# Altium PCB DSD_PLC_SMALL.PcbDoc (part 2 of 2)
Units mil, origin at the board's own origin, x right, y up, seen from the top; angles counter-clockwise.
Board outline 2820 x 3490 mil, 2 copper layers (Top Layer, Bottom Layer); 165 components, 153 nets, 500 pads, 145 vias.
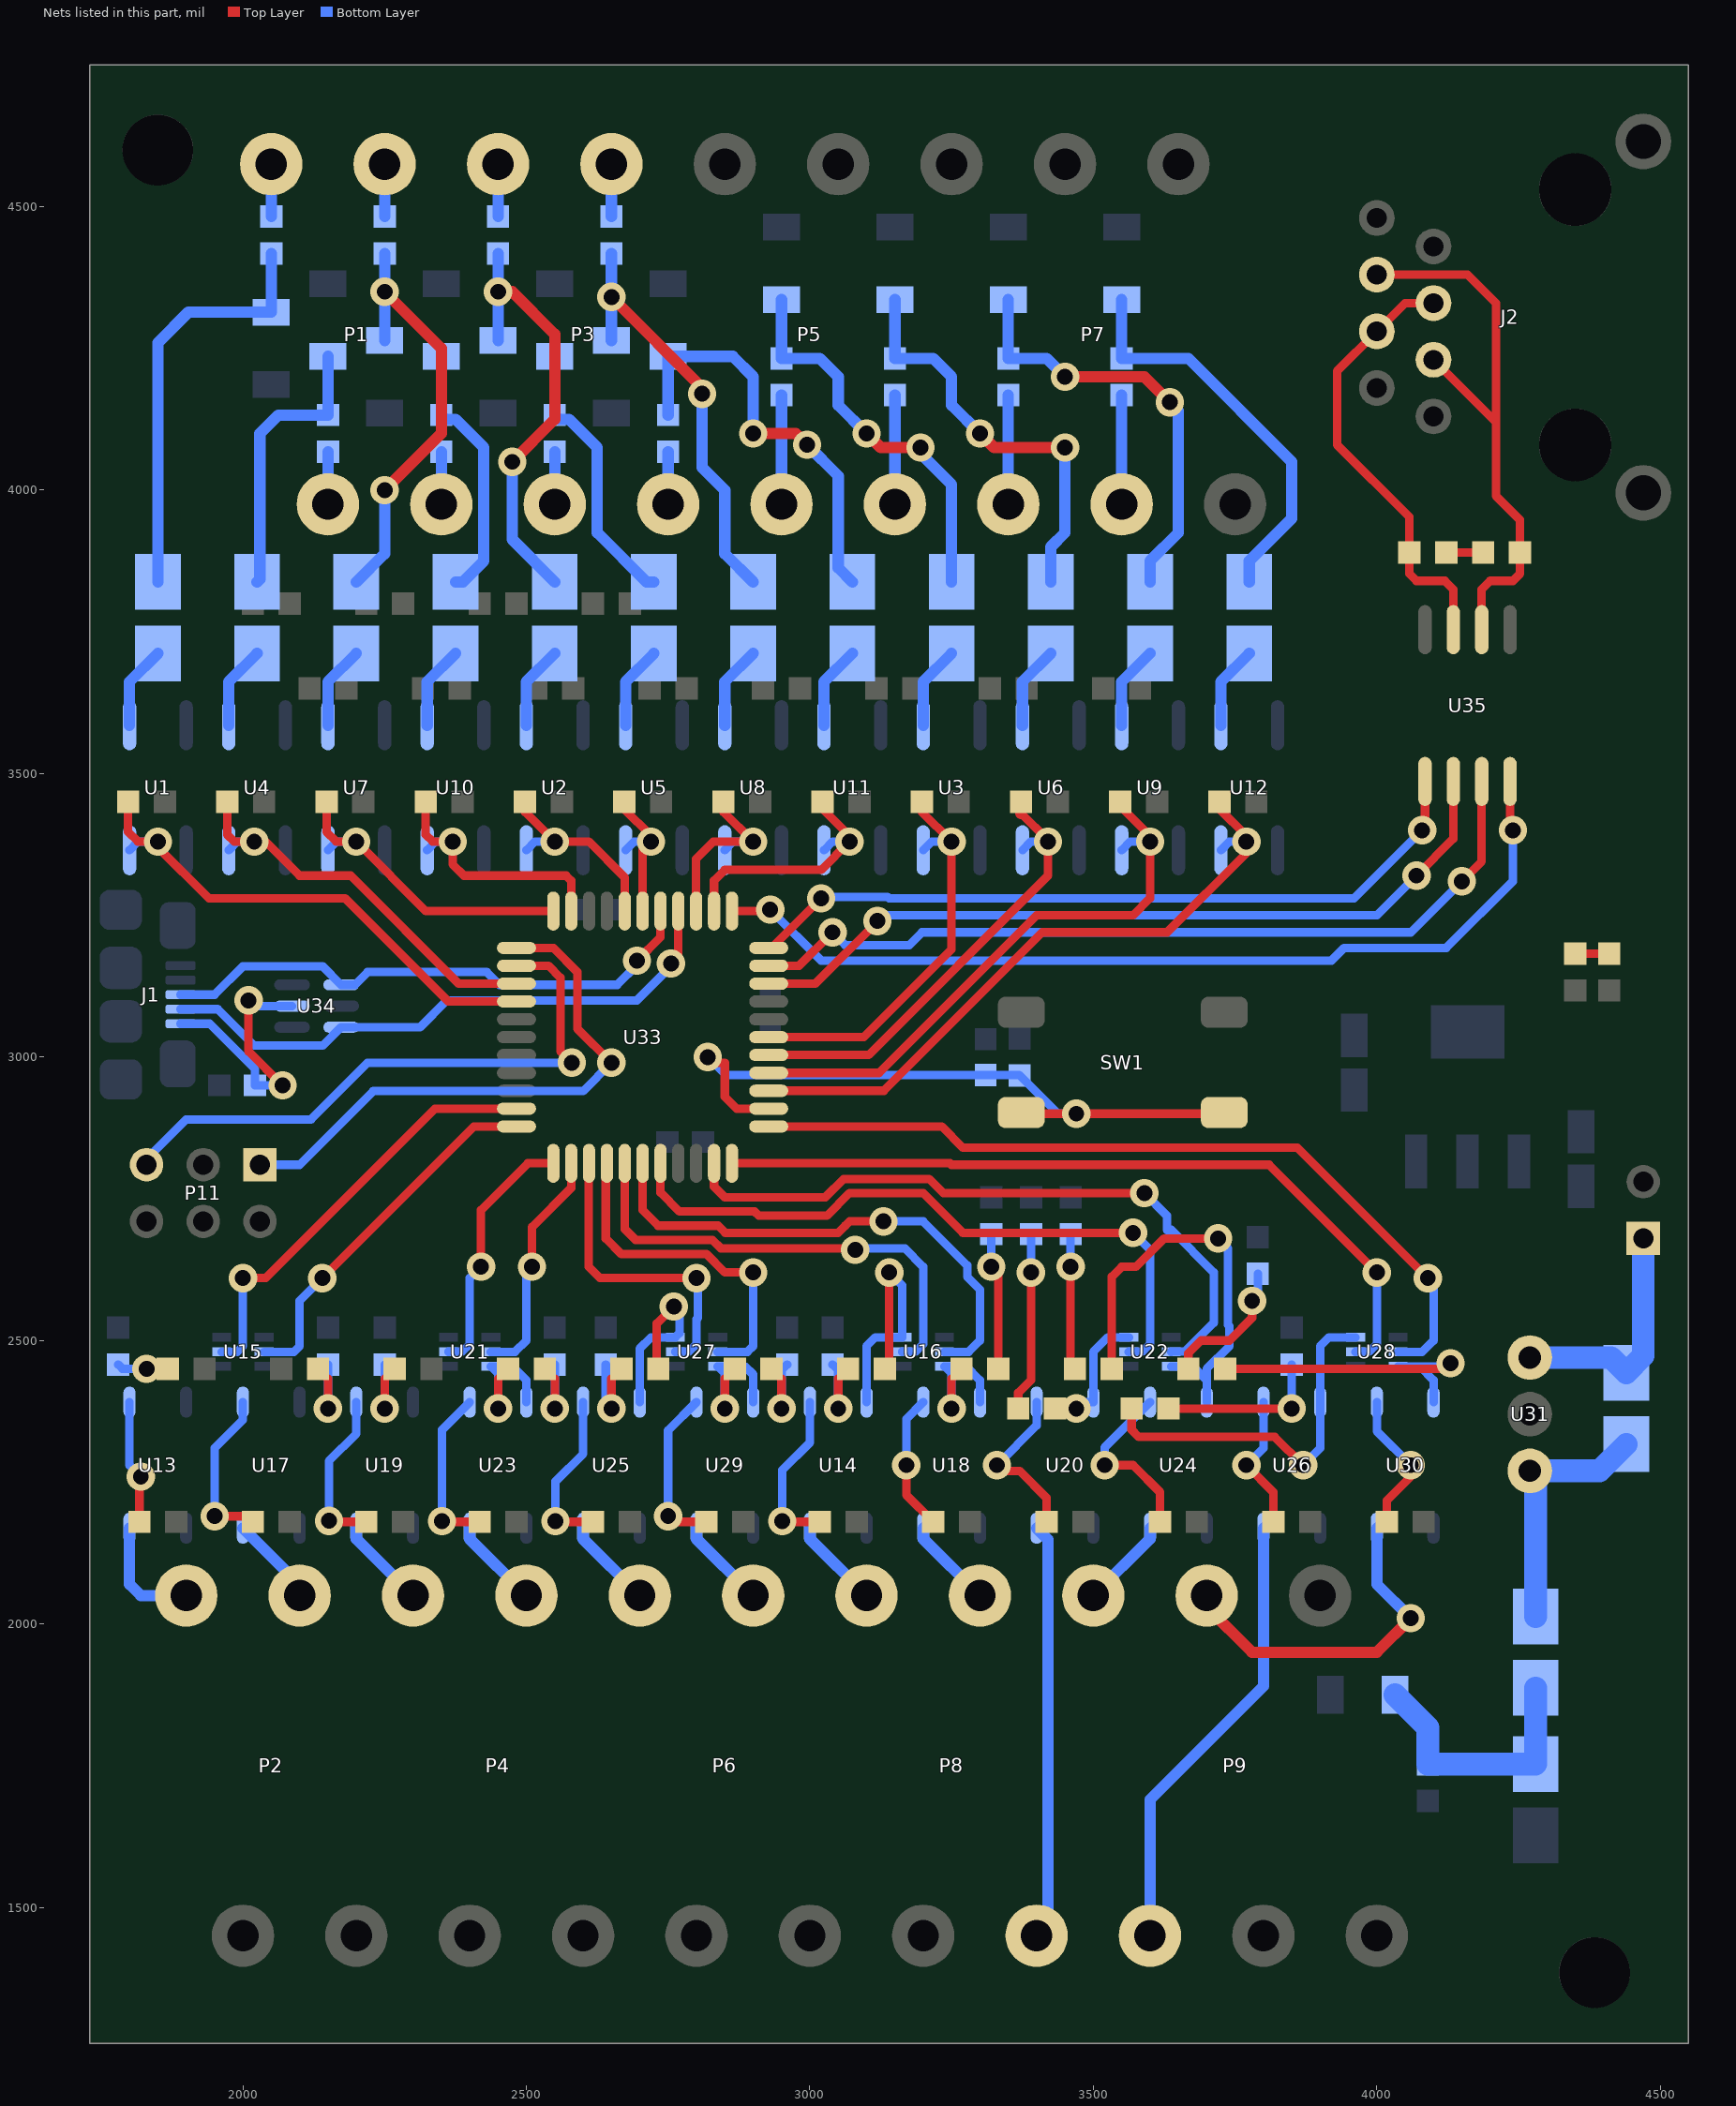
[diagram p2: the nets of this part, all layers, seen from the top]

## Via types
v1: diameter 50, hole 28, Top Layer to Bottom Layer, 145 vias

## Nets (pads, with @x,y where several pads share a name; then routed paths per layer and width w, separated by ;. In a path a pad name is that pad's centre, name@x,y a point inside that pad or via, vN(x,y) a via of type N, cw(c..) or ccw(c..) an arc to the next point about the centre after c; other vN are vias at no path point) (continued)
LED_Y4: D13.2 U21.3 U23.2 | length 268.4
  Top Layer w15: v1(2450,2380) 2450,2432.48 D13.2@2467.52,2450
  Bottom Layer w15: v1(2450,2380) 2450,2441.81 U21.3@2437.4,2454.41 2475.59,2454.41 2500,2430 U23.2@2500,2391.22
LED_Y5: D21.2 U25.2 U27.6 | length 346.8
  Top Layer w15: D21.2@2730,2452.48 2730,2530 v1(2760,2560)
  Bottom Layer w15: U25.2@2700,2391.22 2700,2485.59 2720,2505.59 U27.6@2762.6,2505.59 2770,2512.99 2770,2550 v1(2760,2560)
LED_Y6: D23.2 U27.3 U29.2 | length 274.2
  Top Layer w15: v1(2850,2380) 2850,2432.48 D23.2@2867.52,2450
  Bottom Layer w15: v1(2850,2380) 2850,2441.81 U27.3@2837.4,2454.41 2885.59,2454.41 2900,2440 U29.2@2900,2391.22
LED_Y7: D2.2 U14.2 U16.6 | length 464.7
  Top Layer w15: D2.2@3132.48,2450 3140,2457.52 v1(3140,2620)
  Bottom Layer w15: U14.2@3100,2391.22 3100,2490 3115.59,2505.59 U16.6@3162.6,2505.59 3162.6,2597.4 v1(3140,2620)
LED_Y8: D7.2 U16.3 U18.2 | length 268.4
  Top Layer w15: v1(3250,2380) 3250,2432.48 D7.2@3267.52,2450
  Bottom Layer w15: v1(3250,2380) 3250,2441.81 U16.3@3237.4,2454.41 3275.59,2454.41 3300,2430 U18.2@3300,2391.22
LED_Y9: D12.2 U20.2 U22.6 | length 234.1
  Top Layer w15: D12.2@3432.48,2380 v1(3470,2380)
  Bottom Layer w15: v1(3470,2380) 3481.22,2391.22 U20.2@3500,2391.22 3500,2480 3525.59,2505.59 U22.6@3562.6,2505.59
LED_Y10: D14.2 U22.3 U24.2 | length 764.3
  Top Layer w15: D14.2@3532.48,2450 3532.48,2612.48 3550,2630 3575,2630 3625,2680 v1(3720,2680)
  Bottom Layer w15: U22.3@3637.4,2454.41 3675.59,2454.41 3700,2430 ; U24.2@3700,2391.22 3700,2430 ; v1(3720,2680) 3737.5,2662.5 3737.5,2527.5 3740,2525 3740,2490 3700,2450 3700,2430
LED_Y11: D22.2 U26.2 U28.6 | length 657.4
  Top Layer w15: D22.2@3567.52,2380 3567.52,2342.48 3580,2330 3820,2330 v1(3870,2280)
  Bottom Layer w15: v1(3870,2280) 3900,2310 U26.2@3900,2391.22 3900,2490 3915.59,2505.59 U28.6@3962.6,2505.59
LED_Y12: D24.2 U28.3 U30.2 | length 569.9
  Top Layer w15: D24.2@3732.48,2450 4120,2450 v1(4130,2460)
  Bottom Layer w15: U28.3@4037.4,2454.41 4075.59,2454.41 ; U30.2@4100,2391.22 4100,2430 4075.59,2454.41 ; v1(4130,2460) 4124.41,2454.41 4075.59,2454.41
NetD1_1: D1.1 R1.2 | length 90.6
  Top Layer w15: v1(1830,2450) D1.1@1867.52,2450
  Bottom Layer w15: R1.2@1780,2457.52 1787.52,2450 v1(1830,2450)
NetD2_1: D2.1 R2.2 | length 158.9
  Top Layer w15: v1(3050,2380) 3050,2432.48 D2.1@3067.52,2450
  Bottom Layer w15: R2.2@3040,2457.52 3050,2447.52 v1(3050,2380)
NetD3_1: D3.1 U1.1 | length 147.5
  Bottom Layer w20: U1.1@1800,3585.24 1800,3662.01 D3.1@1850,3712.01
NetD3_2: D3.2 D8.2 R3.1 | length 747.9
  Bottom Layer w20: D3.2@1850,3837.99 1850,4260 1903.98,4313.98 D8.2@2050,4313.98 R3.1@2050,4417.52
NetD4_1: D4.1 U2.1 | length 147.5
  Bottom Layer w20: U2.1@2500,3585.24 2500,3662.01 D4.1@2550,3712.01
NetD4_2: D4.2 D9.2 R4.1 | length 783.7
  Top Layer w20: v1(2450,4350) 2475,4350 2550,4275 2550,4125 v1(2475,4050)
  Bottom Layer w20: D9.2@2450,4263.98 v1(2450,4350) R4.1@2450,4417.52 ; v1(2475,4050) 2475,3912.99 D4.2@2550,3837.99
NetD5_1: D5.1 U3.1 | length 147.5
  Bottom Layer w20: U3.1@3200,3585.24 3200,3662.01 D5.1@3250,3712.01
NetD5_2: D5.2 D10.2 R5.1 | length 702.9
  Top Layer w20: v1(3100,4100) 3125,4075 v1(3195,4075)
  Bottom Layer w20: D10.2@2950,4336.02 R5.1@2950,4232.48 3017.52,4232.48 3050,4200 3050,4150 v1(3100,4100) ; v1(3195,4075) 3195,4065 3250,4010 D5.2@3250,3837.99
NetD6_1: D6.1 R6.2 | length 154.8
  Top Layer w15: D6.1@2132.48,2450 2150,2432.48 v1(2150,2380)
  Bottom Layer w15: v1(2150,2380) R6.2@2150,2457.52
NetD7_1: D7.1 R7.2 | length 242.7
  Top Layer w15: v1(3320,2630) 3332.48,2617.52 D7.1@3332.48,2450
  Bottom Layer w15: v1(3320,2630) R7.2@3320,2687.52
NetD11_1: D11.1 R11.2 | length 154.8
  Top Layer w15: v1(2250,2380) 2250,2432.48 D11.1@2267.52,2450
  Bottom Layer w15: v1(2250,2380) R11.2@2250,2457.52
NetD12_1: D12.1 R12.2 | length 316.8
  Top Layer w15: D12.1@3367.52,2380 3367.52,2407.52 3390,2430 v1(3390,2620)
  Bottom Layer w15: v1(3390,2620) R12.2@3390,2687.52
NetD13_1: D13.1 R13.2 | length 154.8
  Top Layer w15: D13.1@2532.48,2450 2550,2432.48 v1(2550,2380)
  Bottom Layer w15: v1(2550,2380) R13.2@2550,2457.52
NetD14_1: D14.1 R14.2 | length 240.6
  Top Layer w15: v1(3460,2630) 3460,2457.52 D14.1@3467.52,2450
  Bottom Layer w15: v1(3460,2630) R14.2@3460,2687.52
NetD15_1: D15.1 U4.1 | length 147.5
  Bottom Layer w20: U4.1@1975,3585.24 1975,3662.01 D15.1@2025,3712.01
NetD15_2: D15.2 D18.2 R15.1 | length 501.1
  Bottom Layer w20: D15.2@2025,3837.99 2030,3842.99 2030,4100 2062.48,4132.48 R15.1@2150,4132.48 D18.2@2150,4236.02
NetD16_1: D16.1 U5.1 | length 147.5
  Bottom Layer w20: U5.1@2675,3585.24 2675,3662.01 D16.1@2725,3712.01
NetD16_2: D16.2 D19.2 R16.1 | length 488.4
  Bottom Layer w20: D19.2@2550,4236.02 R16.1@2550,4132.48 2557.48,4125 2575,4125 2625,4075 2625,3925 2712.01,3837.99 D16.2@2725,3837.99
NetD17_1: D17.1 U6.1 | length 147.5
  Bottom Layer w20: U6.1@3375,3585.24 3375,3662.01 D17.1@3425,3712.01
NetD17_2: D17.2 D20.2 R17.1 | length 745.4
  Top Layer w20: v1(3300,4100) 3325,4075 v1(3450,4075)
  Bottom Layer w20: D20.2@3150,4336.02 R17.1@3150,4232.48 3217.52,4232.48 3250,4200 3250,4150 v1(3300,4100) ; D17.2@3425,3837.99 3425,3900 3450,3925 v1(3450,4075)
NetD21_1: D21.1 R21.2 | length 158.9
  Top Layer w15: v1(2650,2380) 2650,2432.48 D21.1@2667.52,2450
  Bottom Layer w15: R21.2@2640,2457.52 2640,2390 v1(2650,2380)
NetD22_1: D22.1 R22.2 | length 295
  Top Layer w15: D22.1@3632.48,2380 v1(3850,2380)
  Bottom Layer w15: v1(3850,2380) R22.2@3850,2457.52
NetD23_1: D23.1 R23.2 | length 158.9
  Top Layer w15: D23.1@2932.48,2450 2950,2432.48 v1(2950,2380)
  Bottom Layer w15: v1(2950,2380) 2950,2447.52 R23.2@2960,2457.52
NetD24_1: D24.1 R24.2 | length 247.5
  Top Layer w15: D24.1@3667.52,2450 3667.52,2477.52 3690,2500 3740,2500 3780,2540 v1(3780,2570)
  Bottom Layer w15: v1(3780,2570) 3790,2580 R24.2@3790,2617.52
NetD25_1: D25.1 U7.1 | length 147.5
  Bottom Layer w20: U7.1@2150,3585.24 2150,3662.01 D25.1@2200,3712.01
NetD25_2: D25.2 D28.2 R25.1 | length 769.1
  Top Layer w20: v1(2250,4000) 2350,4100 2350,4250 v1(2250,4350)
  Bottom Layer w20: D25.2@2200,3837.99 2250,3887.99 v1(2250,4000) ; D28.2@2250,4263.98 v1(2250,4350) R25.1@2250,4417.52
NetD26_1: D26.1 U8.1 | length 147.5
  Bottom Layer w20: U8.1@2850,3585.24 2850,3662.01 D26.1@2900,3712.01
NetD26_2: D26.2 D29.2 R26.1 | length 759.9
  Top Layer w20: v1(2650,4340.75) 2810,4180.75 v1(2810,4170)
  Bottom Layer w20: D29.2@2650,4263.98 v1(2650,4340.75) R26.1@2650,4417.52 ; v1(2810,4170) 2810,4040 2850,4000 2850,3887.99 D26.2@2900,3837.99
NetD27_1: D27.1 U9.1 | length 147.5
  Bottom Layer w20: U9.1@3550,3585.24 3550,3662.01 D27.1@3600,3712.01
NetD27_2: D27.2 D30.2 R27.1 | length 764.6
  Top Layer w20: v1(3450,4200) 3590,4200 v1(3635,4155)
  Bottom Layer w20: D30.2@3350,4336.02 R27.1@3350,4232.48 3417.52,4232.48 v1(3450,4200) ; D27.2@3600,3837.99 3600,3875 3650,3925 3650,4140 v1(3635,4155)
NetD35_1: D35.1 U10.1 | length 147.5
  Bottom Layer w20: U10.1@2325,3585.24 2325,3662.01 D35.1@2375,3712.01
NetD35_2: D35.2 D40.2 R31.1 | length 467.7
  Bottom Layer w20: D40.2@2350,4236.02 R31.1@2350,4132.48 2357.48,4125 2375,4125 2425,4075 2425,3875 2387.99,3837.99 D35.2@2375,3837.99
NetD36_1: D36.1 U11.1 | length 147.5
  Bottom Layer w20: U11.1@3025,3585.24 3025,3662.01 D36.1@3075,3712.01
NetD36_2: D36.2 D41.2 R32.1 | length 746.9
  Top Layer w20: v1(2900,4100) 2975,4100 v1(2995,4080)
  Bottom Layer w20: R32.1@2750,4132.48 D41.2@2750,4236.02 2863.98,4236.02 2900,4200 v1(2900,4100) ; v1(2995,4080) 3050,4025 3050,3862.99 D36.2@3075,3837.99
NetD37_1: D37.1 U12.1 | length 147.5
  Bottom Layer w20: U12.1@3725,3585.24 3725,3662.01 D37.1@3775,3712.01
NetD37_2: D37.2 D42.2 R33.1 | length 722.2
  Bottom Layer w20: D42.2@3550,4336.02 R33.1@3550,4232.48 3667.52,4232.48 3850,4050 3850,3950 3775,3875 D37.2@3775,3837.99
NetD49_1: D49.1 R49.2 | length 60
  Top Layer w15: R49.2@4350,3182.48 D49.1@4410,3182.48
NetD50_1: D50.1 P10.1 U31.3 | length 430.6
  Bottom Layer w40: U31.3@4270,2470 4412.99,2470 D50.1@4440,2442.99 4470,2472.99 P10.1@4470,2680
NetD50_2: D50.2 D51.2 U31.1 | length 450.6
  Bottom Layer w40: D51.2@4280,2012.99 4280,2260 U31.1@4270,2270 4392.99,2270 D50.2@4440,2317.01
NetD51_1: D51.1 D52.2 F1.2 M1.1 | length 470.7
  Bottom Layer w20: D52.2@4279.49,1752.48 D52.2@4280,1752.99
  Bottom Layer w40: F1.2@4032.09,1875 4090,1817.09 M1.1@4090,1752.48 D52.2@4279.49,1752.48 ; D52.2@4280,1752.99 D51.1@4280,1887.01
NetJ2_3: J2.3 J2.6 R52.1 U35.6 | length 1031.4
  Top Layer w15: J2.6@4000,4380 4160,4380 4210,4330 4210,4120 ; J2.3@4100,4230 4210,4120 ; U35.6@4185,3753.86 4185,3825 4200,3840 4240,3840 4252.48,3852.48 R52.1@4252.48,3890 4252.48,3947.52 4210,3990 4210,4120
NetJ2_4: J2.4 J2.5 R51.2 U35.7 | length 790.1
  Top Layer w15: J2.5@4100,4330 4050,4330 J2.4@4000,4280 3930,4210 3930,4080 4057.52,3952.48 R51.2@4057.52,3890 4057.52,3852.48 4070,3840 4120,3840 4135,3825 U35.7@4135,3753.86
NetR37_1: R37.1 U13.1 | length 220.5
  Top Layer w15: R37.1@1817.52,2180 1817.52,2257.52 v1(1820,2260)
  Bottom Layer w15: U13.1@1800,2391.22 1800,2280 v1(1820,2260)
NetR38_1: R38.1 U14.1 | length 297
  Top Layer w15: v1(2951.21,2181.21) 2952.42,2180 R38.1@3017.52,2180
  Bottom Layer w15: v1(2951.21,2181.21) 2951.21,2271.21 3000,2320 U14.1@3000,2391.22
NetR39_1: R39.1 U17.1 | length 293.6
  Top Layer w15: v1(1950,2190) 2007.52,2190 R39.1@2017.52,2180
  Bottom Layer w15: v1(1950,2190) 1950,2310 2000,2360 U17.1@2000,2391.22
NetR40_1: R40.1 U18.1 | length 243.3
  Top Layer w15: v1(3170,2280) 3170,2227.52 R40.1@3217.52,2180
  Bottom Layer w15: v1(3170,2280) 3170,2361.22 U18.1@3200,2391.22
NetR41_1: R41.1 U19.1 | length 295.8
  Top Layer w15: v1(2151.82,2181.82) 2153.64,2180 R41.1@2217.52,2180
  Bottom Layer w15: v1(2151.82,2181.82) 2151.82,2287.43 2200,2335.61 U19.1@2200,2391.22
NetR42_1: R42.1 U20.1 | length 294
  Top Layer w15: v1(3330,2280) 3340,2270 3370,2270 3417.52,2222.48 R42.1@3417.52,2180
  Bottom Layer w15: v1(3330,2280) 3400,2350 U20.1@3400,2391.22
NetR43_1: R43.1 U23.1 | length 297
  Top Layer w15: v1(2351.21,2181.21) 2352.42,2180 R43.1@2417.52,2180
  Bottom Layer w15: v1(2351.21,2181.21) 2351.21,2342.43 U23.1@2400,2391.22
NetR44_1: R44.1 U24.1 | length 314
  Top Layer w15: v1(3520,2280) 3570,2280 3617.52,2232.48 R44.1@3617.52,2180
  Bottom Layer w15: v1(3520,2280) 3520,2311.22 U24.1@3600,2391.22
NetR45_1: R45.1 U25.1 | length 297
  Top Layer w15: v1(2551.21,2181.21) 2552.42,2180 R45.1@2617.52,2180
  Bottom Layer w15: v1(2551.21,2181.21) 2551.21,2251.21 2600,2300 U25.1@2600,2391.22
NetR46_1: R46.1 U26.1 | length 243.3
  Top Layer w15: v1(3770,2280) 3817.52,2232.48 R46.1@3817.52,2180
  Bottom Layer w15: v1(3770,2280) 3800,2310 U26.1@3800,2391.22
NetR47_1: R47.1 U29.1 | length 279.5
  Top Layer w15: v1@2760,2180 R47.1@2817.52,2180
  Bottom Layer w15: v1(2750,2190) 2750,2341.22 U29.1@2800,2391.22
NetR48_1: R48.1 U30.1 | length 253.7
  Top Layer w15: R48.1@4017.52,2180 4017.52,2217.52 4060,2260 v1(4060,2280)
  Bottom Layer w15: U30.1@4000,2391.22 4000,2340 v1(4060,2280)
NetR51_1: R51.1 R52.2 | length 65
  Top Layer w15: R51.1@4122.48,3890 R52.2@4187.52,3890
PDI_CLK: P11.5 U33.35 | length 1074.8
  Top Layer w15: U33.35@2482.56,3160.98 2539.02,3160.98 2560,3140 2560,3010 v1(2580,2990)
  Bottom Layer w15: P11.5@1830,2810 1830,2820 1900,2890 2120,2890 2220,2990 v1(2580,2990)
PDI_DATA: P11.1 U33.34 | length 1004.4
  Top Layer w15: U33.34@2482.56,3192.48 2547.52,3192.48 2590,3150 2590,3050 v1(2650,2990)
  Bottom Layer w15: P11.1@2030,2810 2100,2810 2230,2940 2600,2940 v1(2650,2990)
RS485_DE: U33.21 U35.3 | length 1493.6
  Top Layer w15: U33.21@2927.44,3160.98 2980.98,3160.98 v1(3040,3220) ; v1(4150,3310) 4185,3345 U35.3@4185,3486.14
  Bottom Layer w15: v1(3040,3220) 3062.5,3197.5 3175.36,3197.5 3197.86,3220 4060,3220 v1(4150,3310)
RS485_RE: U33.20 U35.2 | length 1424.9
  Top Layer w15: U33.20@2927.44,3129.49 3009.59,3129.49 3119.29,3239.19 v1(3119.29,3240) ; v1@4070,3329.9 v1(4070,3320) 4135,3385 U35.2@4135,3486.14
  Bottom Layer w15: v1(3119.29,3240) 3129.29,3250 4000,3250 v1(4070,3320)
RS485_RX: U33.22 U35.1 | length 1328.8
  Top Layer w15: U33.22@2927.44,3192.48 2932.48,3192.48 v1(3020,3280) ; v1(4080,3400) 4085,3405 U35.1@4085,3486.14
  Bottom Layer w15: v1(3020,3280) 3022.5,3282.5 3136.89,3282.5 3139.39,3280 3960,3280 v1(4080,3400)
RS485_TX: U33.23 U35.4 | length 1652.1
  Top Layer w15: U33.23@2862.48,3257.44 2927.44,3257.44 v1(2930,3260) ; U35.4@4235,3486.14 4235,3405 v1(4240,3400)
  Bottom Layer w15: v1(2930,3260) 3020,3170 3919.9,3170 3942.4,3192.5 4122.5,3192.5 4240,3310 v1(4240,3400)
S_X1: R8.1 U1.6 U33.37 | length 924
  Top Layer w15: R8.1@1797.52,3450 1797.52,3397.18 1814.7,3380 v1(1850,3380) 1850,3370 1940,3280 2180,3280 2362.01,3097.99 U33.37@2482.56,3097.99
  Bottom Layer w15: U1.6@1800,3364.76 1815.24,3380 v1(1850,3380)
S_X2: R18.1 U4.6 U33.36 | length 728
  Top Layer w15: R18.1@1972.52,3450 1972.52,3392.18 1984.7,3380 v1(2020,3380) 2040,3380 2100,3320 2190,3320 2380.51,3129.49 U33.36@2482.56,3129.49
  Bottom Layer w15: U4.6@1975,3364.76 1990.24,3380 v1(2020,3380)
S_X3: R28.1 U7.6 U33.33 | length 567
  Top Layer w15: R28.1@2147.52,3450 2147.52,3397.18 2164.7,3380 v1(2200,3380) 2322.56,3257.44 U33.33@2547.52,3257.44
  Bottom Layer w15: U7.6@2150,3364.76 2165.24,3380 v1(2200,3380)
S_X4: R34.1 U10.6 U33.32 | length 476.2
  Top Layer w15: R34.1@2322.52,3450 2322.52,3392.18 2334.7,3380 v1(2370,3380) 2370,3340 2390,3320 2570,3320 2579.02,3310.98 U33.32@2579.02,3257.44
  Bottom Layer w15: U10.6@2325,3364.76 2340.24,3380 v1(2370,3380)
S_X5: R9.1 U2.6 U33.29 | length 356.9
  Top Layer w15: R9.1@2497.52,3450 2497.52,3432.48 v1(2550,3380) 2610,3380 2673.5,3316.5 U33.29@2673.5,3257.44
  Bottom Layer w15: U2.6@2500,3364.76 2515.24,3380 v1(2550,3380)
S_X6: R19.1 U5.6 U33.28 | length 269.8
  Top Layer w15: R19.1@2672.52,3450 2672.52,3437.48 2720,3390 v1(2720,3380) 2705,3365 U33.28@2705,3257.44
  Bottom Layer w15: U5.6@2675,3364.76 2690.24,3380 v1(2720,3380)
S_X7: R29.1 U8.6 U33.25 | length 353.2
  Top Layer w15: U33.25@2799.49,3257.44 2799.49,3349.49 2830,3380 v1(2900,3380) 2847.52,3432.48 R29.1@2847.52,3450
  Bottom Layer w15: U8.6@2850,3364.76 2865.24,3380 v1(2900,3380)
S_X8: R35.1 U11.6 U33.24 | length 462.1
  Top Layer w15: U33.24@2830.98,3257.44 2830.98,3310.98 2850,3330 3020,3330 v1(3070,3380) 3070,3390 3022.52,3437.48 R35.1@3022.52,3450
  Bottom Layer w15: U11.6@3025,3364.76 3040.24,3380 v1(3070,3380)
S_X9: R10.1 U3.6 U33.17 | length 724.8
  Top Layer w15: U33.17@2927.44,3035 3095,3035 3250,3190 v1(3250,3380) 3197.52,3432.48 R10.1@3197.52,3450
  Bottom Layer w15: U3.6@3200,3364.76 3215.24,3380 v1(3250,3380)
S_X10: R20.1 U6.6 U33.16 | length 824.6
  Top Layer w15: U33.16@2927.44,3003.5 3103.5,3003.5 3420,3320 v1(3420,3380) 3420,3382.52 3372.52,3430
  Top Layer w20: 3372.52,3430 R20.1@3372.52,3450
  Bottom Layer w15: U6.6@3375,3364.76 3390.24,3380 v1(3420,3380)
S_X11: R30.1 U9.6 U33.15 | length 1048.2
  Top Layer w15: U33.15@2927.44,2972.01 3122.01,2972.01 3400,3250 3570,3250 3600,3280 v1(3600,3380) 3600,3390 3547.52,3442.48 R30.1@3547.52,3450
  Bottom Layer w15: U9.6@3550,3364.76 3565.24,3380 v1(3600,3380)
S_X12: R36.1 U12.6 U33.14 | length 1177.3
  Top Layer w15: U33.14@2927.44,2940.51 3130.51,2940.51 3410,3220 3630,3220 3770,3360 v1(3770,3380) 3770,3390 3722.52,3437.48 R36.1@3722.52,3450
  Bottom Layer w15: U12.6@3725,3364.76 3740.24,3380 v1(3770,3380)
S_Y1: U15.2 U33.44 | length 656.7
  Top Layer w15: v1(2140,2610) 2407.52,2877.52 U33.44@2482.56,2877.52
  Bottom Layer w15: U15.2@2037.4,2480 2090,2480 2100,2490 2100,2570 v1(2140,2610)
S_Y2: U15.5 U33.43 | length 768
  Top Layer w15: v1(2000.05,2610.05) 2040.05,2610.05 2339.02,2909.02 U33.43@2482.56,2909.02
  Bottom Layer w15: U15.5@1962.6,2480 1990,2480 2000,2490 2000,2560 2000.05,2560.05 v1(2000.05,2610.05)
S_Y3: U21.2 U33.2 | length 416.2
  Top Layer w15: v1(2510,2630) 2510,2700 2579.02,2769.02 U33.2@2579.02,2812.56
  Bottom Layer w15: U21.2@2437.4,2480 2480,2480 2500,2500 2500,2620 v1(2510,2630)
S_Y4: U21.5 U33.1 | length 449.4
  Top Layer w15: v1(2420,2630) 2420,2730 2502.56,2812.56 U33.1@2547.52,2812.56
  Bottom Layer w15: U21.5@2362.6,2480 2362.82,2480.22 2386.58,2480.22 2400,2493.64 2400,2610 v1(2420,2630)
S_Y5: U27.2 U33.4 | length 615
  Top Layer w15: U33.4@2642.01,2812.56 2640,2810.55 2640,2680 2667.5,2652.5 2817.6,2652.5 2850.1,2620 v1(2900,2620)
  Bottom Layer w15: U27.2@2837.4,2480 2890,2480 2900,2490 v1(2900,2620)
S_Y6: U27.5 U33.3 | length 542.5
  Top Layer w15: U33.3@2610.51,2812.56 2610,2812.05 2610,2630 2630,2610 v1(2800,2610)
  Bottom Layer w15: U27.5@2762.6,2480 2762.82,2480.22 2786.58,2480.22 2800,2493.64 2800,2537.4 2802.5,2539.9 2802.5,2607.5 v1(2800,2610)
S_Y7: U16.2 U33.6 | length 924.7
  Top Layer w15: U33.6@2705,2812.56 2705,2730 2732.5,2702.5 2838.31,2702.5 2850.81,2690 3049.9,2690 3062.4,2702.5 3062.5,2702.5 3070,2710 v1(3130,2710)
  Bottom Layer w15: v1(3130,2710) 3200,2710 3277.5,2632.5 3277.5,2612.4 3300,2589.9 3300,2500 3280,2480 U16.2@3237.4,2480
S_Y8: U16.5 U33.5 | length 851.6
  Top Layer w15: U33.5@2673.5,2812.56 2673.5,2696.5 2692.5,2677.5 2827.96,2677.5 2842.96,2662.5 3077.5,2662.5 v1(3080,2660)
  Bottom Layer w15: v1(3080,2660) 3082.5,2662.5 3167.5,2662.5 3200,2630 3200,2493.64 3186.58,2480.22 3162.82,2480.22 U16.5@3162.6,2480
S_Y9: U22.2 U33.10 | length 1211.9
  Top Layer w15: U33.10@2830.98,2812.56 2830.98,2771.52 2850,2752.5 3027.14,2752.5 3059.64,2785 3210.36,2785 3235.36,2760 v1(3590,2760)
  Bottom Layer w15: v1(3590,2760) 3630,2720 3630,2695 3637.5,2695 3712.5,2620 3712.5,2531.33 3661.38,2480.22 3637.62,2480.22 U22.2@3637.4,2480
S_Y10: U22.5 U33.7 | length 1199.4
  Top Layer w15: U33.7@2736.5,2812.56 2736.5,2761 2770,2727.5 2902.5,2727.5 2910,2720 3030,2720 3070,2760 3200,2760 3270,2690 v1(3570,2690)
  Bottom Layer w15: U22.5@3562.6,2480 3562.82,2480.22 3586.58,2480.22 3600,2493.64 3600,2660 v1(3570,2690)
S_Y11: U28.2 U33.12 | length 1458.4
  Top Layer w15: U33.12@2927.44,2877.52 3232.48,2877.52 3270,2840 3860,2840 v1(4090,2610)
  Bottom Layer w15: U28.2@4037.4,2480 4080,2480 4100,2500 4100,2600 v1(4090,2610)
S_Y12: U28.5 U33.11 | length 1386.7
  Top Layer w15: U33.11@2862.48,2812.56 3247.44,2812.56 3250,2810 3810,2810 v1(4000,2620)
  Bottom Layer w15: U28.5@3962.6,2480 3962.82,2480.22 3986.58,2480.22 4000,2493.64 v1(4000,2620)
SW_PROGRAM: C4.1 R50.1 SW1.2 U33.13 | length 1231.4
  Top Layer w15: v1(2820,3000) 2830,2990 2850,2990 2850,2930 2870.98,2909.02 U33.13@2927.44,2909.02 ; SW1.2@3373,2902 3375,2900 v1(3470,2900) 3729,2900 SW1.2@3731,2902
  Bottom Layer w15: v1(2820,3000) 2851.5,2968.5 C4.1@3310,2968.5 3369.02,2968.5 R50.1@3370,2967.52 3437.52,2900 v1(3470,2900)
USB_DM: J1.2 U33.26 U34.3 | length 1052.5
  Top Layer w15: v1(2755,3165) 2767.99,3177.99 U33.26@2767.99,3257.44
  Bottom Layer w15: J1.2@1890,3084.41 1955.59,3084.41 2020,3020 2140.71,3020 U34.3@2173.31,3052.6 2312.6,3052.6 2360,3100 2695,3100 2755,3160 v1(2755,3165)
USB_DP: J1.3 U33.27 U34.1 | length 984.7
  Top Layer w15: v1(2695,3170) 2736.5,3211.5 U33.27@2736.5,3257.44
  Bottom Layer w15: J1.3@1890,3110 1950,3110 2000,3160 2140.71,3160 U34.1@2173.31,3127.4 2197.4,3127.4 2220,3150 2430,3150 2452.6,3127.4 2660,3127.4 2695,3162.4 v1(2695,3170)
VUSB: C3.2 J1.1 U34.5 | length 497.5
  Top Layer w15: v1(2010,3100) 2010,3010 v1(2070,2950)
  Bottom Layer w15: J1.1@1890,3058.82 1941.18,3058.82 2021.5,2978.5 C3.2@2021.5,2950 v1(2070,2950) ; v1(2010,3100) 2020,3090 U34.5@2086.69,3090
X1: P1.4 R3.2 | length 103.1
  Bottom Layer w10: P1.4@2042.52,4582.48 P1.4@2050,4575
  Bottom Layer w20: R3.2@2050,4482.48 P1.4@2050,4575
X2: P1.3 R15.2 | length 92.5
  Bottom Layer w20: P1.3@2150,3975 R15.2@2150,4067.52
X3: P1.2 R25.2 | length 92.5
  Bottom Layer w20: R25.2@2250,4482.48 P1.2@2250,4575
X4: P1.1 R31.2 | length 92.5
  Bottom Layer w20: P1.1@2350,3975 R31.2@2350,4067.52
X5: P3.4 R4.2 | length 92.5
  Bottom Layer w20: R4.2@2450,4482.48 P3.4@2450,4575
X6: P3.3 R16.2 | length 92.5
  Bottom Layer w20: P3.3@2550,3975 R16.2@2550,4067.52
X7: P3.2 R26.2 | length 92.5
  Bottom Layer w20: R26.2@2650,4482.48 P3.2@2650,4575
X8: P3.1 R32.2 | length 92.5
  Bottom Layer w20: P3.1@2750,3975 R32.2@2750,4067.52
X9: P5.3 R5.2 | length 192.5
  Bottom Layer w20: P5.3@2950,3975 R5.2@2950,4167.52
X10: P5.1 R17.2 | length 192.5
  Bottom Layer w20: P5.1@3150,3975 R17.2@3150,4167.52
X11: P7.5 R27.2 | length 192.5
  Bottom Layer w20: P7.5@3350,3975 R27.2@3350,4167.52
X12: P7.3 R33.2 | length 192.5
  Bottom Layer w20: P7.3@3550,3975 R33.2@3550,4167.52
Y1: P2.1 U13.4 | length 207.1
  Bottom Layer w20: U13.4@1800,2168.78 1800,2070 1820,2050 P2.1@1900,2050
Y2: P2.3 U17.4 | length 160.2
  Bottom Layer w20: U17.4@2000,2168.78 2100,2068.78 P2.3@2100,2050
Y3: P4.1 U19.4 | length 160.2
  Bottom Layer w20: U19.4@2200,2168.78 2200,2150 P4.1@2300,2050
Y4: P4.3 U23.4 | length 160.2
  Bottom Layer w20: U23.4@2400,2168.78 2400,2150 P4.3@2500,2050
Y5: P6.1 U25.4 | length 160.2
  Bottom Layer w20: U25.4@2600,2168.78 2600,2150 P6.1@2700,2050
Y6: P6.3 U29.4 | length 160.2
  Bottom Layer w20: U29.4@2800,2168.78 2800,2150 P6.3@2900,2050
Y7: P8.1 U14.4 | length 160.2
  Bottom Layer w20: U14.4@3000,2168.78 3000,2150 P8.1@3100,2050
Y8: P8.3 U18.4 | length 160.2
  Bottom Layer w20: U18.4@3200,2168.78 3200,2150 P8.3@3300,2050
Y9: P8.4 U20.4 | length 735.3
  Bottom Layer w20: P8.4@3400,1450 3420,1470 3420,2148.78 U20.4@3400,2168.78
Y10: P9.1 U24.4 | length 160.2
  Bottom Layer w20: P9.1@3500,2050 3600,2150 U24.4@3600,2168.78
Y11: P9.2 U26.4 | length 801.6
  Bottom Layer w20: P9.2@3600,1450 3600,1690 3800,1890 U26.4@3800,2168.78
Y12: P9.3 U30.4 | length 621.6
  Top Layer w20: P9.3@3700,2050 3700,2030 3780,1950 4000,1950 v1(4060,2010)
  Bottom Layer w20: U30.4@4000,2168.78 4000,2070 v1(4060,2010)
pads on no net: J1.4 J2. J2.2 J2.7 J2.SHIELD M2.0 M3.0 P7.1 P11.3 P11.4 U33.40 U33.41 U33.42 U34.4 U34.6

## Polygon pours and split planes (outlines as drawn)
GND on Top Layer "Top Layer-No Net" (solid, remove dead copper, pour order 2): 1730,3850 3900,3850 3900,4750 4550,4750 4550,1260 3710,1260 3710,1760 3810,1860 3800,1870 3800,2240 1730,2240 1730,4750
GND on Bottom Layer "Top Layer-No Net" (solid, remove dead copper, pour order 7): 1720,2240 1720,3850 3900,3850 3900,4750 4550,4750 4550,1260 3710,1260 3710,1760 3800,1850 3800,2240 1720,2240

## Silkscreen, mask and mechanical layers (free items; w line width, h text height)
Top Overlay:
  lines w10: 2000,2415 2000,2590 ; 2100,2240 2100,2415 ; 2150,3685 2150,3860 ; 2200,2415 2200,2590 ; 2250,3510 2250,3685 ; 2300,2240 2300,2415 ; 2350,3685 2350,3860 ; 2400,2415 2400,2590 ; 2450,3510 2450,3685 ; 2500,2240 2500,2415 ; 2550,3685 2550,3860 ; 2600,2415 2600,2590 ; 2650,3510 2650,3685 ; 2700,2240 2700,2415 ; 2750,3685 2750,3860 ; 2800,2415 2800,2590 ; 2850,3510 2850,3685 ; 2900,2240 2900,2415 ; 2950,3685 2950,3860 ; 3000,2415 3000,2590 ; 3050,3510 3050,3685 ; 3100,2240 3100,2415 ; 3150,3685 3150,3860 ; 3200,2415 3200,2590 ; 3250,3510 3250,3685 ; 3300,2240 3300,2415 ; 3350,3685 3350,3860 ; 3400,2415 3400,2590 ; 3450,3510 3450,3685 ; 3500,2240 3500,2415 ; 3550,3685 3550,3860 ; 3650,3510 3650,3685 ; 4000,2415 4000,2590 3800,2590 ; 3600,2590 3800,2590 ; 3600,2590 3600,2415 1800,2415 1800,2590 3600,2590 ; 3700,2240 3900,2240 ; 3700,2240 3700,2415 ; 3700,2240 1900,2240 1900,2415 3700,2415 ; 3700,2415 3900,2415 ; 3800,2590 3800,2415 3800,2590 ; 3900,2240 4100,2240 4100,2415 3900,2415 ; 3900,2240 3900,2415 ; 1950,3685 3750,3685 3750,3860 1950,3860 1950,3685 ; 2050,3510 2050,3685 3850,3685 3850,3510 2050,3510 ; 4252,3042 4252,3296 4485,3296 4492,3289 4492,3037 4257,3037 4252,3042
  text "COM9" at 2970,3710.72 h60
  text "COM10" at 3160,3710.72 h60
  text "COM11" at 3360,3710.72 h60
  text "COM12" at 3560,3710.72 h60
  text "X1" at 2000,3710 h90
  text "X3" at 2200,3710 h90
  text "X5" at 2400,3710 h90
  text "X7" at 2600,3710 h90
  text "COMM" at 2770,3710 h60
  text "X2" at 2100,3540 h90
  text "X4" at 2300,3540 h90
  text "X6" at 2500,3540 h90
  text "X8" at 2700,3540 h90
  text "X9" at 2900,3540 h90
  text "X10" at 3080,3540 h90
  text "X11" at 3280,3540 h90
  text "X12" at 3480,3540 h90
  text "DSD-PLC" at 1840,3240 h120
  text "POWER" at 4268,3239 h60
  text "SMALL V1 REV. B" at 1840,3200 h50
  text "January 2016" at 1840,3160 h40
  text "POWER JMP" at 4398,2625 h40 r90
  text "Y6" at 2870,2500 h90
  text "Y7" at 3050,2500 h90
  text "Y8" at 3260,2500 h90
  text "Y10" at 3420,2500 h90
  text "Y12" at 3620,2500 h90
  text "24V" at 3830,2500 h90
  text "Y1" at 1850,2490 h90
  text "Y2" at 2050,2490 h90
  text "Y3" at 2250,2490 h90
  text "Y4" at 2450,2490 h90
  text "Y5" at 2650,2490 h90
  text "COM1" at 1920,2300.72 h60
  text "COM2" at 2120,2300.72 h60
  text "COM3" at 2330,2300.72 h60
  text "COM4" at 2520,2300.72 h60
  text "COM5" at 2720,2300.72 h60
  text "COM6" at 2920,2300.72 h60
  text "COMM" at 3110,2300.72 h60
  text "GND" at 3750,2300.72 h60
  text "GND" at 3950,2300.72 h60
  text "Y9" at 3340,2280 h90
  text "Y11" at 3540,2280 h90
Bottom Overlay:
  text "NICOLA.VELASQUEZ531@GMAIL.COM" at 3380,1300 h40
  text "NICOLAS VELASQUEZ" at 3840,1300 h40
Mechanical 1:
  lines w10: 1725,1260 1725,4750 4550,4750 4550,1260 ; 1725,1261 4550,1261

## Text inside footprints (layer, text, board x,y; h text height)
U31: Top Overlay "Gnd" at 4361.54,2322.17 h60 r90; Top Overlay "Vout" at 4362.52,2467.83 h60 r90; Top Overlay "Vin" at 4362.52,2176.5 h60 r90; Top Overlay "DC/DC" at 4512.13,2416.65 h60 r90